# Altium PCB PCB1.PcbDoc (part 2 of 10)
Units mm, origin at the board's own origin, x right, y up, seen from the top; angles counter-clockwise.
Board outline 171.83 x 244.04 mm, 2 copper layers (Top Layer, Bottom Layer); 100 components, 186 nets, 878 pads, 221 vias.
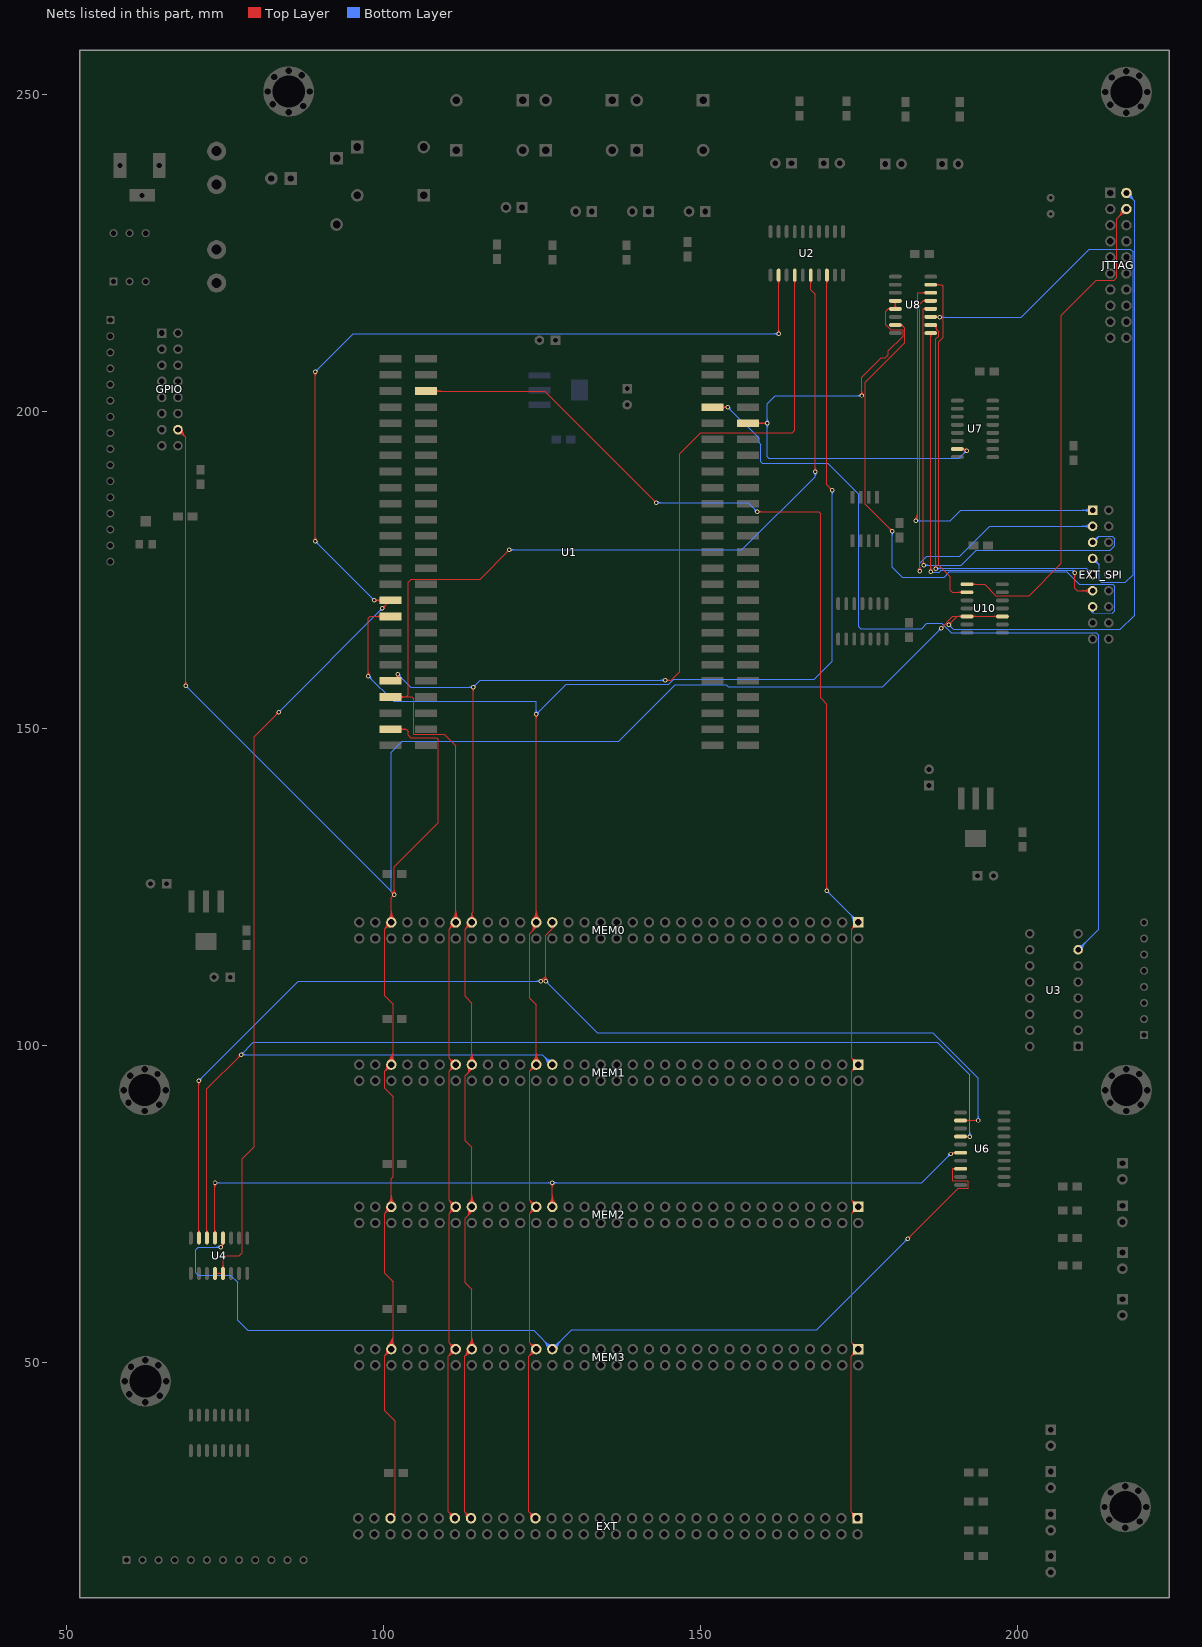
[diagram p2: the nets of this part, all layers, seen from the top]

## Via types
v1: diameter 0.7, hole 0.4, Top Layer to Bottom Layer, 221 vias

## Nets (pads, with @x,y where several pads share a name; then routed paths per layer and width w, separated by ;. In a path a pad name is that pad's centre, name@x,y a point inside that pad or via, vN(x,y) a via of type N, cw(c..) or ccw(c..) an arc to the next point about the centre after c; other vN are vias at no path point) (continued)
/32SEL: EXT.41 MEM0.41 MEM1.41 MEM2.41 MEM3.41 U1.83 U2.8 | length 344.2
  Top Layer w0.152: v1@97.419,158.436 ccw(c96.951,158.903) 97.612,158.903 ccw(c98.273,158.903) v1@97.806,158.436 ; v1(97.612,158.242) 97.612,167.322 97.93,167.64 U1.83@101.092,167.64 ; U1.83@99.572,167.27 ccw(c98.677,166.375) 98.677,167.64 ccw(c98.677,168.905) U1.83@99.572,168.01 ; U1.83@99.679,167.377 ccw(c99.045,166.743) 99.045,167.64 ccw(c99.045,168.537) U1.83@99.679,167.903 ; EXT.41@123.215,25.531 ccw(c122.226,25.706) 122.936,26.416 ; MEM3.41@123.333,52.008 cw(c121.967,51.896) 122.936,50.927 ; MEM3.41@123.339,52.186 ccw(c122.278,52.352) 123.038,53.111 ; MEM2.41@123.339,74.391 cw(c122.278,74.225) 123.038,73.465 ; MEM2.41@123.339,74.623 ccw(c122.278,74.789) 123.038,75.548 ; MEM1.41@123.339,96.827 cw(c122.278,96.661) 123.038,95.902 ; EXT.41@123.365,25.504 ccw(c122.577,25.644) 123.143,26.209 ccw(c123.708,26.775) EXT.41@123.848,25.987 ; 123.419,117.958 ccw(c122.897,118.479) MEM0.41@123.484,118.926 ; MEM3.41@123.485,52.021 cw(c122.397,51.931) 123.169,51.16 cw(c123.94,50.388) MEM3.41@124.03,51.476 ; MEM3.41@123.49,52.162 ccw(c122.645,52.295) 123.25,52.899 ccw(c123.854,53.504) MEM3.41@123.987,52.659 ; MEM2.41@123.49,74.414 cw(c122.645,74.282) 123.25,73.677 cw(c123.854,73.073) MEM2.41@123.987,73.917 ; MEM2.41@123.49,74.599 ccw(c122.645,74.731) 123.25,75.336 ccw(c123.854,75.941) MEM2.41@123.987,75.096 ; MEM1.41@123.49,96.851 cw(c122.645,96.719) 123.25,96.114 cw(c123.854,95.509) MEM1.41@123.987,96.354 ; EXT.41@123.515,25.478 ccw(c122.929,25.581) 123.35,26.002 ccw(c123.771,26.423) EXT.41@123.874,25.837 ; 123.542,118.081 ccw(c123.037,118.586) MEM0.41@123.605,119.018 ; MEM1.41@123.55,97.473 ccw(c122.271,98.751) 124.079,98.751 ccw(c125.887,98.751) MEM1.41@124.608,97.473 ; MEM0.41@123.55,119.909 ccw(c122.271,121.188) 124.079,121.188 ccw(c125.887,121.188) MEM0.41@124.608,119.909 ; MEM3.41@123.637,52.034 cw(c122.827,51.967) 123.401,51.392 cw(c123.976,50.818) MEM3.41@124.043,51.628 ; MEM3.41@123.64,52.139 ccw(c123.011,52.237) 123.462,52.687 ccw(c123.912,53.138) MEM3.41@124.01,52.509 ; MEM2.41@123.64,74.438 cw(c123.011,74.339) 123.462,73.889 cw(c123.912,73.439) MEM2.41@124.01,74.068 ; MEM2.41@123.64,74.575 ccw(c123.011,74.674) 123.462,75.124 ccw(c123.912,75.574) MEM2.41@124.01,74.945 ; MEM1.41@123.64,96.875 cw(c123.011,96.776) 123.462,96.326 cw(c123.912,95.876) MEM1.41@124.01,96.505 ; MEM1.41@123.657,97.365 ccw(c122.639,98.383) 124.079,98.383 ccw(c125.519,98.383) MEM1.41@124.501,97.365 ; MEM0.41@123.657,119.802 ccw(c122.639,120.82) 124.079,120.82 ccw(c125.519,120.82) MEM0.41@124.501,119.802 ; 123.665,118.204 ccw(c123.177,118.692) MEM0.41@123.726,119.111 ; MEM1.41@123.765,97.257 ccw(c123.007,98.015) 124.079,98.015 ccw(c125.151,98.015) MEM1.41@124.393,97.257 ; MEM0.41@123.765,119.694 ccw(c123.007,120.452) 124.079,120.452 ccw(c125.151,120.452) MEM0.41@124.393,119.694 ; 123.788,118.327 ccw(c123.317,118.799) MEM0.41@123.847,119.203 ; EXT.41@123.821,26.137 cw(c123.646,27.126) 122.936,26.416 ; v1@123.885,152.029 cw(c123.418,151.561) 124.079,151.561 cw(c124.74,151.561) v1@124.273,152.029 ; 123.912,118.451 ccw(c123.457,118.906) MEM0.41@123.968,119.296 ; EXT.41@123.952,25.4 122.936,26.416 ; MEM3.41@123.963,52.81 cw(c123.797,53.871) 123.038,53.111 ; MEM2.41@123.963,73.767 ccw(c123.797,72.706) 123.038,73.465 ; MEM2.41@123.963,75.246 cw(c123.797,76.307) 123.038,75.548 ; MEM1.41@123.963,96.204 ccw(c123.797,95.143) 123.038,95.902 ; MEM3.41@124.017,51.324 ccw(c123.905,49.958) 122.936,50.927 ; v1(124.079,152.222) MEM0.41@124.079,119.38 124.079,118.618 123.038,117.577 123.038,107.417 124.079,106.375 MEM1.41@124.079,96.943 123.038,95.902 ; U2.8@169.764,220.615 cw(c169.374,220.225) 169.926,220.225 cw(c170.478,220.225) U2.8@170.088,220.615 ; U2.8@169.926,221.488 169.926,188.443 v1(170.79,187.579) ; v1@170.516,187.579 ccw(c169.855,187.579) 170.322,188.046 ccw(c170.79,188.514) v1@170.79,187.853 ; 122.936,26.416 122.936,50.927 ; 122.936,50.927 MEM3.41@124.079,52.07 123.038,53.111 ; 123.038,53.111 123.038,73.465 ; 123.038,73.465 MEM2.41@124.079,74.507 123.038,75.548 ; 123.038,75.548 123.038,95.902
  Bottom Layer w0.152: v1@97.612,157.968 cw(c97.612,157.307) 98.08,157.775 cw(c98.547,158.242) v1@97.886,158.242 ; v1(97.612,158.242) 101.625,154.229 124.079,154.229 v1(124.079,152.222) 128.796,156.939 144.952,156.939 145.743,157.73 167.966,157.73 170.79,160.553 v1(170.79,187.579) ; v1@123.885,152.416 ccw(c123.418,152.883) 124.079,152.883 ccw(c124.74,152.883) v1@124.273,152.416 ; v1@124.079,152.496 ccw(c124.079,153.157) 124.546,152.69 ccw(c125.014,152.222) v1@124.353,152.222 ; v1@170.596,187.385 cw(c170.129,186.918) 170.79,186.918 cw(c171.451,186.918) v1@170.983,187.385
/CS: U1.81 U2.2 U4.4 U4.5 | length 266.2
  Top Layer w0.152: U4.4@73.406,64.008 U4.5@74.676,64.008 74.676,66.358 75.12,66.802 77.216,66.802 77.724,67.31 77.724,82.093 79.604,83.972 79.604,148.692 v1(83.439,152.527) ; U4.4@73.568,63.846 cw(c73.958,63.456) 73.958,64.008 cw(c73.958,64.56) U4.4@73.568,64.17 ; U4.5@74.514,63.846 ccw(c74.124,63.456) 74.124,64.008 ccw(c74.124,64.56) U4.5@74.514,64.17 ; U4.5@74.514,64.881 ccw(c74.124,65.271) 74.676,65.271 ccw(c75.228,65.271) U4.5@74.838,64.881 ; v1@83.165,152.527 cw(c82.504,152.527) 82.972,152.06 cw(c83.439,151.592) v1@83.439,152.253 ; v1@89.037,179.695 ccw(c88.569,180.163) 89.23,180.163 ccw(c89.891,180.163) v1@89.424,179.695 ; v1@89.037,206.042 cw(c88.569,205.574) 89.23,205.574 cw(c89.891,205.574) v1@89.424,206.042 ; v1(89.23,179.502) v1(89.23,206.235) ; v1(98.552,170.18) U1.81@101.092,170.18 v1(99.822,168.91) ; v1@98.746,169.986 cw(c99.213,169.519) 99.213,170.18 cw(c99.213,170.841) v1@98.746,170.374 ; U1.81@99.572,169.81 ccw(c98.677,168.915) 98.677,170.18 ccw(c98.677,171.445) U1.81@99.572,170.55 ; U1.81@99.679,169.917 ccw(c99.045,169.283) 99.045,170.18 ccw(c99.045,171.077) U1.81@99.679,170.443 ; v1@99.822,169.184 ccw(c99.822,169.845) 100.289,169.377 ccw(c100.757,168.91) v1@100.096,168.91 ; v1@162.112,212.411 ccw(c161.645,212.878) 162.306,212.878 ccw(c162.967,212.878) v1@162.5,212.411 ; U2.2@162.144,220.615 cw(c161.754,220.225) 162.306,220.225 cw(c162.858,220.225) U2.2@162.468,220.615 ; v1(162.306,212.217) U2.2@162.306,221.488
  Bottom Layer w0.152: v1(83.439,152.527) v1(99.822,168.91) ; v1@83.439,152.801 ccw(c83.439,153.462) 83.906,152.994 ccw(c84.374,152.527) v1@83.713,152.527 ; v1@89.23,179.228 cw(c89.23,178.567) 89.698,179.034 cw(c90.165,179.502) v1@89.504,179.502 ; v1(89.23,179.502) v1(98.552,170.18) ; v1(89.23,206.235) 95.212,212.217 v1(162.306,212.217) ; v1@89.23,206.509 ccw(c89.23,207.17) 89.698,206.703 ccw(c90.165,206.235) v1@89.504,206.235 ; v1@98.278,170.18 ccw(c97.617,170.18) 98.085,170.647 ccw(c98.552,171.115) v1@98.552,170.454 ; v1@99.548,168.91 cw(c98.887,168.91) 99.355,168.443 cw(c99.822,167.975) v1@99.822,168.636 ; v1@162.112,212.023 ccw(c161.645,211.556) 161.645,212.217 ccw(c161.645,212.878) v1@162.112,212.411
/CS0: MEM0.39 U4.15 U6.2 | length 190.8
  Top Layer w0.152: v1@70.672,94.244 cw(c70.205,93.776) 70.866,93.776 cw(c71.527,93.776) v1@71.06,94.244 ; U4.15@70.704,70.469 ccw(c70.314,70.859) 70.866,70.859 ccw(c71.418,70.859) U4.15@71.028,70.469 ; U4.15@70.866,69.596 v1(70.866,94.437) ; v1(124.79,110.109) 125.578,110.896 ; v1@124.79,110.383 ccw(c124.79,111.044) 125.258,110.576 ccw(c125.725,110.109) v1@125.064,110.109 ; v1@125.384,110.303 ccw(c124.917,110.77) 125.578,110.77 ccw(c126.239,110.77) v1@125.771,110.303 ; v1(125.578,110.109) 125.578,110.896 ; MEM0.39@126.415,118.66 cw(c126.338,118.389) 126.619,118.389 ; MEM0.39@126.619,119.38 126.619,118.389 ; MEM0.39@126.823,118.66 ccw(c126.9,118.389) 126.619,118.389 ; U6.2@191.008,88.138 v1(193.802,88.138) ; U6.2@191.881,87.976 cw(c192.271,87.586) 192.271,88.138 cw(c192.271,88.69) U6.2@191.881,88.3 ; v1@193.608,87.944 ccw(c193.141,87.477) 193.141,88.138 ccw(c193.141,88.799) v1@193.608,88.332 ; 125.578,110.896 125.578,117.348 126.619,118.389
  Bottom Layer w0.152: v1(70.866,94.437) 86.538,110.109 v1(124.79,110.109) ; v1@70.866,94.711 ccw(c70.866,95.372) 71.333,94.905 ccw(c71.801,94.437) v1@71.14,94.437 ; v1@124.597,109.915 ccw(c124.129,109.448) 124.129,110.109 ccw(c124.129,110.77) v1@124.597,110.303 ; v1@125.578,109.835 cw(c125.578,109.174) 126.045,109.642 cw(c126.512,110.109) v1@125.851,110.109 ; v1(125.578,110.109) 133.731,101.956 186.614,101.956 193.802,94.767 v1(193.802,88.138) ; v1@193.608,88.332 ccw(c193.141,88.799) 193.802,88.799 ccw(c194.463,88.799) v1@193.996,88.332
/CS1: MEM1.39 U4.14 U6.4 | length 223.7
  Top Layer w0.152: U4.14@71.974,70.469 ccw(c71.584,70.859) 72.136,70.859 ccw(c72.688,70.859) U4.14@72.298,70.469 ; U4.14@72.136,69.596 72.136,93.142 v1(77.521,98.527) ; v1@77.247,98.527 cw(c76.586,98.527) 77.053,98.059 cw(c77.521,97.592) v1@77.521,98.253 ; U6.4@191.008,85.598 v1(192.456,85.598) ; U6.4@191.881,85.436 cw(c192.271,85.046) 192.271,85.598 cw(c192.271,86.15) U6.4@191.881,85.76 ; v1@192.262,85.404 ccw(c191.795,84.937) 191.795,85.598 ccw(c191.795,86.259) v1@192.262,85.792
  Bottom Layer w0.152: v1@77.521,98.8 ccw(c77.521,99.461) 77.988,98.994 ccw(c78.456,98.527) v1@77.795,98.527 ; v1@77.714,98.333 cw(c78.182,97.866) 78.182,98.527 cw(c78.182,99.188) v1@77.714,98.72 ; MEM1.39@125.87,96.943 ccw(c124.062,96.943) 125.341,98.222 ccw(c126.619,99.5) MEM1.39@126.619,97.692 ; MEM1.39@126.023,96.943 ccw(c124.583,96.943) 125.601,97.961 ccw(c126.619,98.98) MEM1.39@126.619,97.54 ; MEM1.39@126.175,96.943 ccw(c125.103,96.943) 125.861,97.701 ccw(c126.619,98.459) MEM1.39@126.619,97.387 ; MEM1.39@126.619,96.943 125.036,98.527 v1(77.521,98.527) 79.451,100.457 187.325,100.457 192.456,95.326 v1(192.456,85.598) ; v1@192.262,85.792 ccw(c191.795,86.259) 192.456,86.259 ccw(c193.117,86.259) v1@192.649,85.792
/CS2: MEM2.39 U4.13 U6.6 | length 149.2
  Top Layer w0.152: v1@73.212,78.115 cw(c72.745,77.647) 73.406,77.647 cw(c74.067,77.647) v1@73.6,78.115 ; U4.13@73.244,70.469 ccw(c72.854,70.859) 73.406,70.859 ccw(c73.958,70.859) U4.13@73.568,70.469 ; U4.13@73.406,69.596 v1(73.406,78.308) ; MEM2.39@126.09,75.036 ccw(c124.811,76.314) 126.619,76.314 ccw(c128.427,76.314) MEM2.39@127.148,75.036 ; MEM2.39@126.197,74.928 ccw(c125.179,75.947) 126.619,75.947 ccw(c128.059,75.947) MEM2.39@127.041,74.928 ; MEM2.39@126.305,74.821 ccw(c125.547,75.579) 126.619,75.579 ccw(c127.691,75.579) MEM2.39@126.933,74.821 ; v1@126.425,78.115 cw(c125.958,77.647) 126.619,77.647 cw(c127.28,77.647) v1@126.813,78.115 ; MEM2.39@126.619,74.507 v1(126.619,78.308) ; v1@189.411,82.877 cw(c189.849,82.439) 189.849,83.058 ; v1(189.433,82.855) 189.636,83.058 U6.6@191.008,83.058 ; v1@189.519,82.769 cw(c190.217,82.071) U6.6@190.217,83.058 ; v1@189.627,82.661 cw(c190.585,81.703) U6.6@190.585,83.058 ; U6.6@190.135,82.896 ccw(c189.745,82.506) 189.745,83.058 ccw(c189.745,83.61) U6.6@190.135,83.22
  Bottom Layer w0.152: v1(73.406,78.308) v1(126.619,78.308) 184.887,78.308 v1(189.433,82.855) ; v1@73.6,78.115 cw(c74.067,77.647) 74.067,78.308 cw(c74.067,78.969) v1@73.6,78.502 ; v1@126.425,78.115 ccw(c125.958,77.647) 125.958,78.308 ccw(c125.958,78.969) v1@126.425,78.502 ; v1@126.813,78.115 cw(c127.28,77.647) 127.28,78.308 cw(c127.28,78.969) v1@126.813,78.502 ; v1@189.159,82.855 cw(c188.498,82.855) 188.966,82.387 cw(c189.433,81.92) v1@189.433,82.581
/CS3: MEM3.39 U4.12 U6.8 | length 176
  Top Layer w0.152: v1(74.295,68.174) 74.676,68.555 ; v1@74.337,68.444 ccw(c74.398,68.833) 74.676,68.555 ; v1@74.46,68.339 ccw(c74.236,68.563) U4.12@74.492,68.75 ; v1@74.566,68.216 cw(c74.954,68.277) 74.676,68.555 ; 74.586,68.464 ccw(c74.381,68.669) U4.12@74.615,68.84 ; U4.12@74.596,68.671 cw(c74.552,68.555) 74.676,68.555 ; U4.12@74.676,69.596 74.676,68.555 ; U4.12@74.756,68.671 ccw(c74.8,68.555) 74.676,68.555 ; v1(182.651,69.469) 190.652,77.47 192.202,77.47 192.227,77.495 192.227,78.461 192.075,78.613 189.84,78.613 189.789,78.664 189.789,80.493 189.814,80.518 ; v1@182.651,69.743 ccw(c182.651,70.404) 183.119,69.936 ccw(c183.586,69.469) v1@182.925,69.469 ; U6.8@190.12,80.373 ccw(c189.814,80.123) 189.814,80.518 ; U6.8@190.12,80.663 cw(c189.814,80.913) 189.814,80.518 ; U6.8@191.008,80.518 189.814,80.518
  Bottom Layer w0.152: v1@74.101,67.98 ccw(c73.634,67.513) 73.634,68.174 ccw(c73.634,68.835) v1@74.101,68.367 ; v1(74.295,68.174) 70.802,68.174 70.358,67.729 70.358,64.135 70.739,63.754 75.794,63.754 76.962,62.586 76.962,56.642 78.562,55.042 123.647,55.042 MEM3.39@126.619,52.07 129.692,55.143 168.326,55.143 v1(182.651,69.469) ; MEM3.39@125.87,52.07 ccw(c124.062,52.07) 125.341,53.348 ccw(c126.619,54.627) 126.619,52.819 ccw(c126.619,54.627) 127.897,53.348 ccw(c129.176,52.07) MEM3.39@127.368,52.07 ; MEM3.39@126.023,52.07 ccw(c124.583,52.07) 125.601,53.088 ccw(c126.619,54.106) 126.619,52.666 ccw(c126.619,54.106) 127.637,53.088 ccw(c128.655,52.07) MEM3.39@127.215,52.07 ; MEM3.39@126.175,52.07 ccw(c125.103,52.07) 125.861,52.828 ccw(c126.619,53.586) 126.619,52.514 ccw(c126.619,53.586) 127.377,52.828 ccw(c128.135,52.07) MEM3.39@127.063,52.07 ; v1@182.378,69.469 cw(c181.717,69.469) 182.184,69.002 cw(c182.651,68.534) v1@182.651,69.195
/CS_JTTAG: JTTAG.4 U10.1 | length 87.2
  Top Layer w0.152: U10.1@192.024,172.72 194.818,172.72 196.596,170.942 201.803,170.942 206.858,175.997 206.858,215.138 212.42,220.701 215.265,220.701 215.671,221.107 215.671,230.403 JTTAG.4@217.17,231.902 ; U10.1@192.897,172.558 cw(c193.287,172.168) 193.287,172.72 cw(c193.287,173.272) U10.1@192.897,172.882 ; JTTAG.4@216.421,231.902 cw(c214.613,231.902) 215.892,230.624 cw(c217.17,229.345) JTTAG.4@217.17,231.153 ; JTTAG.4@216.574,231.902 cw(c215.134,231.902) 216.152,230.884 cw(c217.17,229.866) JTTAG.4@217.17,231.306 ; JTTAG.4@216.726,231.902 cw(c215.654,231.902) 216.412,231.144 cw(c217.17,230.386) JTTAG.4@217.17,231.458
/CS_SPI: U1.10 U7.7 U8.4 U8.5 | length 97.4
  Top Layer w0.152: U1.10@157.48,198.12 v1(160.528,198.12) ; U1.10@158.893,197.857 cw(c159.527,197.223) 159.527,198.12 cw(c159.527,199.017) U1.10@158.893,198.383 ; U1.10@159,197.75 cw(c159.895,196.855) 159.895,198.12 cw(c159.895,199.385) U1.10@159,198.49 ; v1@160.334,197.926 ccw(c159.867,197.459) 159.867,198.12 ccw(c159.867,198.781) v1@160.334,198.314 ; v1@175.244,202.682 ccw(c174.777,203.15) 175.438,203.15 ccw(c176.099,203.15) v1@175.631,202.682 ; v1(175.438,202.489) 175.438,205.359 178.505,208.426 179.113,208.426 179.602,208.915 179.602,209.523 181.94,211.861 181.94,212.827 181.915,212.852 180.01,212.852 179.222,213.639 179.222,215.773 179.603,216.154 ; U8.5@179.814,216.035 ccw(c179.603,215.907) 179.603,216.154 ; U8.5@179.814,216.273 cw(c179.603,216.401) 179.603,216.154 ; U8.5@180.559,216.316 ccw(c180.169,216.706) 180.721,216.706 ccw(c181.273,216.706) U8.5@180.883,216.316 ; U8.4@180.559,217.262 cw(c180.169,216.872) 180.721,216.872 cw(c181.273,216.872) U8.4@180.883,217.262 ; U8.4@180.721,217.424 U8.5@180.721,216.154 179.603,216.154 ; U7.7@190.5,194.056 191.719,194.056 ; U7.7@190.699,194.056 cw(c190.699,192.528) v1@191.78,193.608 ; U7.7@191.067,194.056 cw(c191.067,192.896) v1@191.887,193.716 ; U7.7@191.382,193.904 cw(c191.719,193.606) 191.719,194.056 ; U7.7@191.382,194.208 ccw(c191.719,194.506) 191.719,194.056 ; U7.7@191.435,194.056 cw(c191.435,193.264) v1@191.995,193.824 ; v1(191.973,193.802) 191.719,194.056
  Bottom Layer w0.152: v1@160.334,197.926 cw(c159.867,197.459) 160.528,197.459 cw(c161.189,197.459) v1@160.722,197.926 ; v1@160.334,198.314 ccw(c159.867,198.781) 160.528,198.781 ccw(c161.189,198.781) v1@160.722,198.314 ; v1@175.244,202.295 ccw(c174.777,201.828) 174.777,202.489 ccw(c174.777,203.15) v1@175.244,202.682 ; v1(175.438,202.489) 161.798,202.489 160.528,201.219 v1(160.528,198.12) 160.528,192.837 160.782,192.583 190.754,192.583 v1(191.973,193.802) ; v1@191.699,193.802 cw(c191.038,193.802) 191.506,193.335 cw(c191.973,192.867) v1@191.973,193.528
/OE: EXT.51 MEM0.51 MEM1.51 MEM2.51 MEM3.51 U1.93 U2.6 | length 317.9
  Top Layer w0.152: U1.93@101.092,154.94 103.569,154.94 ; U1.93@102.505,154.677 cw(c103.139,154.043) 103.139,154.94 cw(c103.139,155.837) U1.93@102.505,155.203 ; U1.93@102.612,154.57 cw(c103.507,153.675) 103.507,154.94 cw(c103.507,156.205) U1.93@102.612,155.31 ; EXT.51@110.515,25.531 ccw(c109.526,25.706) 110.236,26.416 ; MEM3.51@110.633,52.008 cw(c109.267,51.896) 110.236,50.927 ; MEM3.51@110.639,52.186 ccw(c109.578,52.352) 110.338,53.111 ; MEM2.51@110.639,74.391 cw(c109.578,74.225) 110.338,73.465 ; MEM2.51@110.639,74.623 ccw(c109.578,74.789) 110.338,75.548 ; MEM1.51@110.639,96.827 cw(c109.578,96.661) 110.338,95.902 ; MEM1.51@110.639,97.059 ccw(c109.578,97.225) 110.338,97.985 ; MEM0.51@110.639,119.264 cw(c109.578,119.098) 110.338,118.339 ; EXT.51@110.665,25.504 ccw(c109.877,25.644) 110.443,26.209 ccw(c111.008,26.775) EXT.51@111.148,25.987 ; MEM3.51@110.785,52.021 cw(c109.697,51.931) 110.469,51.16 cw(c111.24,50.388) MEM3.51@111.33,51.476 ; MEM3.51@110.79,52.162 ccw(c109.945,52.295) 110.55,52.899 ccw(c111.154,53.504) MEM3.51@111.287,52.659 ; MEM2.51@110.79,74.414 cw(c109.945,74.282) 110.55,73.677 cw(c111.154,73.073) MEM2.51@111.287,73.917 ; MEM2.51@110.79,74.599 ccw(c109.945,74.731) 110.55,75.336 ccw(c111.154,75.941) MEM2.51@111.287,75.096 ; MEM1.51@110.79,96.851 cw(c109.945,96.719) 110.55,96.114 cw(c111.154,95.509) MEM1.51@111.287,96.354 ; MEM1.51@110.79,97.036 ccw(c109.945,97.168) 110.55,97.773 ccw(c111.154,98.377) MEM1.51@111.287,97.533 ; MEM0.51@110.79,119.288 cw(c109.945,119.155) 110.55,118.551 cw(c111.154,117.946) MEM0.51@111.287,118.791 ; EXT.51@110.815,25.478 ccw(c110.229,25.581) 110.65,26.002 ccw(c111.071,26.423) EXT.51@111.174,25.837 ; MEM0.51@110.85,119.909 ccw(c109.571,121.188) 111.379,121.188 ccw(c113.187,121.188) MEM0.51@111.908,119.909 ; MEM3.51@110.937,52.034 cw(c110.127,51.967) 110.701,51.392 cw(c111.276,50.818) MEM3.51@111.343,51.628 ; MEM3.51@110.94,52.139 ccw(c110.311,52.237) 110.762,52.687 ccw(c111.212,53.138) MEM3.51@111.31,52.509 ; MEM2.51@110.94,74.438 cw(c110.311,74.339) 110.762,73.889 cw(c111.212,73.439) MEM2.51@111.31,74.068 ; MEM2.51@110.94,74.575 ccw(c110.311,74.674) 110.762,75.124 ccw(c111.212,75.574) MEM2.51@111.31,74.945 ; MEM1.51@110.94,96.875 cw(c110.311,96.776) 110.762,96.326 cw(c111.212,95.876) MEM1.51@111.31,96.505 ; MEM1.51@110.94,97.012 ccw(c110.311,97.111) 110.762,97.561 ccw(c111.212,98.011) MEM1.51@111.31,97.382 ; MEM0.51@110.94,119.311 cw(c110.311,119.213) 110.762,118.763 cw(c111.212,118.312) MEM0.51@111.31,118.941 ; MEM0.51@110.957,119.802 ccw(c109.939,120.82) 111.379,120.82 ccw(c112.819,120.82) MEM0.51@111.801,119.802 ; MEM0.51@111.065,119.694 ccw(c110.307,120.452) 111.379,120.452 ccw(c112.451,120.452) MEM0.51@111.693,119.694 ; EXT.51@111.121,26.137 cw(c110.946,27.126) 110.236,26.416 ; EXT.51@111.252,25.4 110.236,26.416 ; MEM3.51@111.263,52.81 cw(c111.097,53.871) 110.338,53.111 ; MEM2.51@111.263,73.767 ccw(c111.097,72.706) 110.338,73.465 ; MEM2.51@111.263,75.246 cw(c111.097,76.307) 110.338,75.548 ; MEM1.51@111.263,96.204 ccw(c111.097,95.143) 110.338,95.902 ; MEM1.51@111.263,97.683 cw(c111.097,98.744) 110.338,97.985 ; MEM0.51@111.263,118.64 ccw(c111.097,117.579) 110.338,118.339 ; MEM3.51@111.317,51.324 ccw(c111.205,49.958) 110.236,50.927 ; v1@119.563,178.13 cw(c118.902,178.13) 119.37,177.663 cw(c119.837,177.195) v1@119.837,177.856 ; v1(119.837,178.13) 115.24,173.533 104.381,173.533 103.886,173.037 103.886,155.257 103.569,154.94 ; U2.6@167.224,220.615 cw(c166.834,220.225) 167.386,220.225 cw(c167.938,220.225) U2.6@167.548,220.615 ; U2.6@167.386,221.488 167.386,219.177 168.097,218.465 v1(168.097,190.462) ; v1@167.904,190.656 ccw(c167.436,191.123) 168.097,191.123 ccw(c168.758,191.123) v1@168.291,190.656 ; 103.569,154.94 104.409,154.94 104.727,154.623 104.727,149.098 104.768,149.057 109.591,149.057 111.379,147.269 MEM0.51@111.379,119.38 110.338,118.339 ; 110.236,26.416 110.236,50.927 ; 110.236,50.927 MEM3.51@111.379,52.07 110.338,53.111 ; 110.338,53.111 110.338,73.465 ; 110.338,73.465 MEM2.51@111.379,74.507 110.338,75.548 ; 110.338,75.548 110.338,95.902 ; 110.338,95.902 MEM1.51@111.379,96.943 110.338,97.985 ; 110.338,97.985 110.338,118.339
  Bottom Layer w0.152: v1(119.837,178.13) 156.521,178.13 168.097,189.706 v1(168.097,190.462) ; v1@120.031,177.937 cw(c120.498,177.469) 120.498,178.13 cw(c120.498,178.791) v1@120.031,178.324 ; v1@167.904,190.268 cw(c167.436,189.801) 168.097,189.801 cw(c168.758,189.801) v1@168.291,190.268
/RESET: EXT.59 GPIO.14 JTTAG.2 MEM0.59 MEM1.59 MEM2.59 MEM3.59 U1.97 U10.5 U10.10 | length 536.9
  Top Layer w0.152: GPIO.14@67.564,196.43 cw(c67.564,194.804) 68.714,195.954 cw(c69.864,197.104) GPIO.14@68.238,197.104 ; GPIO.14@67.564,196.583 cw(c67.564,195.324) 68.454,196.214 cw(c69.344,197.104) GPIO.14@68.085,197.104 ; GPIO.14@67.564,196.735 cw(c67.564,195.844) 68.194,196.474 cw(c68.824,197.104) GPIO.14@67.933,197.104 ; GPIO.14@67.564,197.104 68.783,195.885 v1(68.783,156.693) ; v1@68.59,156.886 ccw(c68.122,157.354) 68.783,157.354 ccw(c69.444,157.354) v1@68.977,156.886 ; MEM3.59@100.479,51.954 cw(c99.418,51.788) 100.178,51.029 ; MEM2.59@100.479,74.391 cw(c99.418,74.225) 100.178,73.465 ; MEM1.59@100.479,96.827 cw(c99.418,96.661) 100.178,95.902 ; MEM0.59@100.479,119.264 cw(c99.418,119.098) 100.178,118.339 ; MEM3.59@100.63,51.978 cw(c99.785,51.845) 100.39,51.241 cw(c100.994,50.636) MEM3.59@101.127,51.481 ; MEM2.59@100.63,74.414 cw(c99.785,74.282) 100.39,73.677 cw(c100.994,73.073) MEM2.59@101.127,73.917 ; MEM1.59@100.63,96.851 cw(c99.785,96.719) 100.39,96.114 cw(c100.994,95.509) MEM1.59@101.127,96.354 ; MEM0.59@100.63,119.288 cw(c99.785,119.155) 100.39,118.551 cw(c100.994,117.946) MEM0.59@101.127,118.791 ; MEM3.59@100.69,52.599 ccw(c98.614,54.675) 101.549,54.675 ; MEM2.59@100.69,75.036 ccw(c99.411,76.314) 101.219,76.314 ccw(c103.027,76.314) MEM2.59@101.748,75.036 ; MEM1.59@100.69,97.473 ccw(c98.614,99.548) 101.549,99.548 ; MEM0.59@100.69,119.909 ccw(c99.411,121.188) 101.219,121.188 ccw(c103.027,121.188) MEM0.59@101.748,119.909 ; MEM3.59@100.78,52.001 cw(c100.151,51.903) 100.602,51.453 cw(c101.052,51.002) MEM3.59@101.15,51.631 ; MEM2.59@100.78,74.438 cw(c100.151,74.339) 100.602,73.889 cw(c101.052,73.439) MEM2.59@101.15,74.068 ; MEM1.59@100.78,96.875 cw(c100.151,96.776) 100.602,96.326 cw(c101.052,95.876) MEM1.59@101.15,96.505 ; MEM0.59@100.78,119.311 cw(c100.151,119.213) 100.602,118.763 cw(c101.052,118.312) MEM0.59@101.15,118.941 ; MEM3.59@100.797,52.492 ccw(c98.982,54.307) 101.549,54.307 ; MEM2.59@100.797,74.928 ccw(c99.779,75.947) 101.219,75.947 ccw(c102.659,75.947) MEM2.59@101.641,74.928 ; MEM1.59@100.797,97.365 ccw(c98.982,99.18) 101.549,99.18 ; MEM0.59@100.797,119.802 ccw(c99.779,120.82) 101.219,120.82 ccw(c102.659,120.82) MEM0.59@101.641,119.802 ; MEM3.59@100.905,52.384 ccw(c99.35,53.939) 101.549,53.939 ; MEM2.59@100.905,74.821 ccw(c100.147,75.579) 101.219,75.579 ccw(c102.291,75.579) MEM2.59@101.533,74.821 ; MEM1.59@100.905,97.257 ccw(c99.35,98.812) 101.549,98.812 ; MEM0.59@100.905,119.694 ccw(c100.147,120.452) 101.219,120.452 ccw(c102.291,120.452) MEM0.59@101.533,119.694 ; MEM3.59@101.013,52.276 ccw(c99.718,53.571) 101.549,53.571 ; MEM1.59@101.013,97.15 ccw(c99.718,98.444) 101.549,98.444 ; EXT.59@101.092,25.4 101.803,26.111 101.803,40.712 100.178,42.338 100.178,51.029 ; U1.97@101.092,149.86 103.569,149.86 103.886,149.542 103.886,148.907 104.296,148.498 108.41,148.498 108.636,148.273 108.636,135.128 101.702,128.194 v1(101.702,123.774) ; MEM3.59@101.103,51.33 ccw(c100.937,50.269) 100.178,51.029 ; MEM2.59@101.103,73.767 ccw(c100.937,72.706) 100.178,73.465 ; MEM1.59@101.103,96.204 ccw(c100.937,95.143) 100.178,95.902 ; MEM0.59@101.103,118.64 ccw(c100.937,117.579) 100.178,118.339 ; MEM3.59@101.121,52.168 ccw(c100.086,53.203) 101.549,53.203 ; MEM1.59@101.121,97.042 ccw(c100.086,98.077) 101.549,98.077 ; 101.219,124.257 v1(101.702,123.774) ; MEM3.59@101.228,52.061 ccw(c100.454,52.835) 101.549,52.835 ; MEM1.59@101.228,96.934 ccw(c100.454,97.709) 101.549,97.709 ; v1@101.508,123.968 ccw(c101.041,124.435) 101.702,124.435 ccw(c102.363,124.435) v1@101.895,123.968 ; 101.549,53.081 ccw(c102.23,53.081) MEM3.59@101.748,52.599 ; 101.549,97.954 ccw(c102.23,97.954) MEM1.59@101.748,97.473 ; v1@101.702,123.5 ccw(c101.702,122.839) 101.234,123.307 ccw(c100.767,123.774) 101.428,123.774 ccw(c100.767,123.774) 101.234,124.242 ccw(c101.702,124.709) v1@101.702,124.048 ; U1.97@102.505,149.597 cw(c103.139,148.963) 103.139,149.86 cw(c103.139,150.757) U1.97@102.505,150.123 ; U1.97@102.612,149.49 cw(c103.507,148.595) 103.507,149.86 cw(c103.507,151.125) U1.97@102.612,150.23 ; v1(187.973,165.798) 189.814,167.64 190.449,167.64 ; v1@187.973,166.072 ccw(c187.973,166.733) 188.44,166.266 ccw(c188.908,165.798) v1@188.246,165.798 ; v1(189.141,166.332) 190.449,167.64 ; v1@189.141,166.606 ccw(c189.141,167.267) 189.609,166.799 ccw(c190.076,166.332) v1@189.415,166.332 ; U10.5@191.151,167.478 ccw(c190.761,167.088) 190.761,167.64 ccw(c190.761,168.192) U10.5@191.151,167.802 ; U10.5@192.897,167.478 cw(c193.287,167.088) 193.287,167.64 cw(c193.287,168.192) U10.5@192.897,167.802 ; U10.10@196.739,167.478 ccw(c196.349,167.088) 196.349,167.64 ccw(c196.349,168.192) U10.10@196.739,167.802 ; U10.10@197.612,167.64 U10.5@192.024,167.64 190.449,167.64 ; 100.178,51.029 MEM3.59@101.219,52.07 101.549,52.07 101.549,62.687 100.178,64.059 100.178,73.465 ; 100.178,73.465 MEM2.59@101.219,74.507 101.219,78.918 101.549,79.248 101.549,91.846 100.178,93.218 100.178,95.902 ; 100.178,95.902 MEM1.59@101.219,96.943 101.549,96.943 101.549,106.477 100.178,107.848 100.178,118.339 ; 100.178,118.339 MEM0.59@101.219,119.38 101.219,123.292 v1(101.702,123.774)
  Bottom Layer w0.152: v1@68.783,156.419 cw(c68.783,155.758) 69.251,156.225 cw(c69.718,156.693) v1@69.057,156.693 ; v1(68.783,156.693) 101.219,124.257 ; v1@101.428,123.774 ccw(c100.767,123.774) 101.234,124.242 ccw(c101.702,124.709) v1@101.702,124.048 ; v1(101.702,123.774) 101.219,124.257 ; v1@187.699,165.798 cw(c187.038,165.798) 187.505,165.331 cw(c187.973,164.864) v1@187.973,165.525 ; v1(187.973,165.798) 178.765,156.591 154.356,156.591 154.082,156.865 145.995,156.865 137.085,147.955 102.972,147.955 101.219,146.202 101.219,124.257 ; v1@189.141,166.058 cw(c189.141,165.397) 189.609,165.864 cw(c190.076,166.332) v1@189.415,166.332 ; v1(189.141,166.332) 189.89,165.583 216.23,165.583 218.491,167.843 218.491,233.121 JTTAG.2@217.17,234.442 ; JTTAG.2@217.17,233.693 cw(c217.17,231.885) 218.448,233.164 cw(c219.727,234.442) JTTAG.2@217.919,234.442 ; JTTAG.2@217.17,233.846 cw(c217.17,232.406) 218.188,233.424 cw(c219.206,234.442) JTTAG.2@217.766,234.442 ; JTTAG.2@217.17,233.998 cw(c217.17,232.926) 217.928,233.684 cw(c218.686,234.442) JTTAG.2@217.614,234.442
/SPICS0: U8.15 U10.2 | length 55.7
  Top Layer w0.152: U8.15@186.309,219.964 188.062,219.964 188.31,219.716 188.31,211.716 187.528,210.934 187.528,175.707 189.344,173.891 189.344,171.767 189.662,171.45 U10.2@192.024,171.45 ; U8.15@187.182,219.802 cw(c187.572,219.412) 187.572,219.964 cw(c187.572,220.516) U8.15@187.182,220.126 ; U10.2@191.151,171.288 ccw(c190.761,170.898) 190.761,171.45 ccw(c190.761,172.002) U10.2@191.151,171.612
/SPICS1: EXT_SPI.1 U8.14 | length 77.8
  Top Layer w0.152: v1@183.779,182.947 ccw(c182.637,184.089) 184.252,184.089 ; v1@183.886,182.839 ccw(c183.005,183.721) 184.252,183.721 ; v1(183.972,182.753) 184.252,183.032 184.252,218.669 184.277,218.694 U8.14@186.309,218.694 ; v1@183.994,182.731 ccw(c183.373,183.353) 184.252,183.353 ; v1@184.102,182.623 ccw(c183.74,182.985) 184.252,182.985 ; U8.14@185.436,218.532 ccw(c185.046,218.142) 185.046,218.694 ccw(c185.046,219.246) U8.14@185.436,218.856
  Bottom Layer w0.152: v1(183.972,182.753) 189.382,182.753 191.033,184.404 EXT_SPI.1@211.836,184.404 ; v1@184.166,182.559 cw(c184.633,182.092) 184.633,182.753 cw(c184.633,183.414) v1@184.166,182.947 ; EXT_SPI.1@211.36,183.928 ccw(c210.209,182.777) 210.209,184.404 ccw(c210.209,186.031) EXT_SPI.1@211.36,184.88 ; EXT_SPI.1@211.467,184.035 ccw(c210.577,183.145) 210.577,184.404 ccw(c210.577,185.663) EXT_SPI.1@211.467,184.773 ; EXT_SPI.1@211.575,184.143 ccw(c210.945,183.513) 210.945,184.404 ccw(c210.945,185.295) EXT_SPI.1@211.575,184.665
/SPICS2: EXT_SPI.3 U8.13 | length 83.8
  Top Layer w0.152: v1@184.35,174.971 ccw(c183.883,175.438) 184.544,175.438 ccw(c185.205,175.438) v1@184.737,174.971 ; v1(184.544,174.777) 184.544,216.865 185.102,217.424 ; U8.13@185.424,217.276 ccw(c185.103,217.002) 185.103,217.424 ; U8.13@185.424,217.572 cw(c185.103,217.846) 185.103,217.424 ; U8.13@186.309,217.424 185.102,217.424
  Bottom Layer w0.152: v1@184.35,174.971 ccw(c183.883,175.438) 184.544,175.438 ccw(c185.205,175.438) v1@184.737,174.971 ; v1(184.544,174.777) 184.544,176.022 185.676,177.154 190.895,177.154 195.605,181.864 EXT_SPI.3@211.836,181.864 ; EXT_SPI.3@211.36,181.388 ccw(c210.209,180.237) 210.209,181.864 ccw(c210.209,183.491) EXT_SPI.3@211.36,182.34 ; EXT_SPI.3@211.467,181.495 ccw(c210.577,180.605) 210.577,181.864 ccw(c210.577,183.123) EXT_SPI.3@211.467,182.233 ; EXT_SPI.3@211.575,181.603 ccw(c210.945,180.973) 210.945,181.864 ccw(c210.945,182.755) EXT_SPI.3@211.575,182.125
/SPICS3: EXT_SPI.5 U8.12 | length 84.9
  Top Layer w0.152: v1@184.978,175.905 ccw(c184.708,176.175) 185.09,176.175 ; 185.09,176.202 ccw(c185.662,176.202) v1@185.257,175.797 ; 185.09,176.57 ccw(c186.03,176.57) v1@185.365,175.905 ; v1(185.172,175.712) 185.09,175.793 185.09,216.129 185.115,216.154 ; U8.12@185.421,216.009 ccw(c185.115,215.759) 185.115,216.154 ; U8.12@185.421,216.299 cw(c185.115,216.549) 185.115,216.154 ; U8.12@186.309,216.154 185.115,216.154
  Bottom Layer w0.152: v1(185.172,175.712) 191.129,175.712 193.497,178.079 214.605,178.079 215.329,178.804 215.329,179.92 214.96,180.289 212.801,180.289 ; v1@185.365,175.518 cw(c185.833,175.051) 185.833,175.712 cw(c185.833,176.373) v1@185.365,175.905 ; EXT_SPI.5@211.836,179.324 212.801,180.289 ; EXT_SPI.5@211.904,179.841 ccw(c212.011,180.643) 212.583,180.071 ccw(c213.155,179.499) EXT_SPI.5@212.353,179.392 ; EXT_SPI.5@211.924,179.992 ccw(c212.062,181.029) 212.801,180.289 ; EXT_SPI.5@212.504,179.412 cw(c213.541,179.55) 212.801,180.289
/SPICS4: EXT_SPI.7 U8.11 | length 105.4
  Top Layer w0.152: U8.11@186.309,214.884 187.731,214.884 v1(187.757,214.859) ; U8.11@187.034,214.884 cw(c187.034,214.136) v1@187.563,214.665 ; U8.11@187.157,214.884 ccw(c187.157,215.458) v1@187.563,215.052 ; U8.11@187.182,214.722 cw(c187.572,214.332) 187.572,214.884 cw(c187.572,215.436) U8.11@187.182,215.046 ; 187.402,214.884 cw(c187.402,214.504) v1@187.671,214.773
  Bottom Layer w0.152: v1(187.757,214.859) 200.609,214.859 211.303,225.552 217.805,225.552 218.211,225.146 218.211,174.219 216.992,172.999 213.208,172.999 212.852,173.355 212.852,175.768 ; v1@187.95,214.665 cw(c188.418,214.198) 188.418,214.859 cw(c188.418,215.52) v1@187.95,215.052 ; EXT_SPI.7@211.836,176.784 212.852,175.768 ; EXT_SPI.7@211.87,176.417 cw(c211.93,175.765) 212.392,176.228 cw(c212.855,176.69) EXT_SPI.7@212.203,176.75 ; EXT_SPI.7@211.884,176.265 cw(c211.968,175.344) 212.622,175.998 cw(c213.276,176.652) EXT_SPI.7@212.355,176.736 ; EXT_SPI.7@211.898,176.113 cw(c212.007,174.923) 212.852,175.768 ; EXT_SPI.7@212.507,176.722 ccw(c213.697,176.613) 212.852,175.768
/SPICS5: EXT_SPI.9 U8.10 | length 73.5
  Top Layer w0.152: U8.10@186.309,213.614 187.249,213.614 187.249,212.852 187.528,212.573 187.528,211.861 187.071,211.404 v1(187.071,175.158) ; v1@186.877,175.352 ccw(c186.41,175.819) 187.071,175.819 ccw(c187.732,175.819) v1@187.265,175.352 ; U8.10@186.905,213.416 cw(c186.557,212.818) 187.249,212.818 ; U8.10@186.982,213.548 cw(c186.711,213.084) 187.249,213.084 ; U8.10@187.059,213.68 cw(c186.866,213.349) 187.249,213.349
  Bottom Layer w0.152: v1(187.071,175.158) 187.127,175.215 210.865,175.215 ; v1@187.157,175.073 cw(c187.5,174.729) 187.5,175.215 ; v1@187.265,174.965 cw(c187.868,174.361) 187.868,175.215 ; v1@187.265,175.352 ccw(c187.596,175.683) 187.596,175.215 ; EXT_SPI.9@211.168,174.329 ccw(c210.115,174.464) 210.865,175.215 ; EXT_SPI.9@211.319,174.31 ccw(c210.504,174.414) 211.085,174.995 ccw(c211.666,175.576) EXT_SPI.9@211.77,174.761 ; EXT_SPI.9@211.47,174.291 ccw(c210.893,174.365) 211.304,174.776 ccw(c211.715,175.187) EXT_SPI.9@211.789,174.61 ; EXT_SPI.9@211.751,174.912 cw(c211.616,175.965) 210.865,175.215 ; EXT_SPI.9@211.836,174.244 210.865,175.215
/SPICS6: EXT_SPI.11 U8.9 | length 75.8
  Top Layer w0.152: v1@186.115,174.895 ccw(c185.648,175.362) 186.309,175.362 ccw(c186.97,175.362) v1@186.503,174.895 ; U8.9@186.147,212.182 cw(c185.757,211.792) 186.309,211.792 cw(c186.861,211.792) U8.9@186.471,212.182 ; v1(186.309,174.701) U8.9@186.309,212.344 ; v1@208.823,174.355 cw(c208.356,173.888) 209.017,173.888 cw(c209.678,173.888) v1@209.21,174.355 ; v1(209.017,174.549) 209.017,172.085 209.398,171.704 EXT_SPI.11@211.836,171.704 ; EXT_SPI.11@211.36,171.228 ccw(c210.209,170.077) 210.209,171.704 ccw(c210.209,173.331) EXT_SPI.11@211.36,172.18 ; EXT_SPI.11@211.467,171.335 ccw(c210.577,170.445) 210.577,171.704 ccw(c210.577,172.963) EXT_SPI.11@211.467,172.073 ; EXT_SPI.11@211.575,171.443 ccw(c210.945,170.813) 210.945,171.704 ccw(c210.945,172.595) EXT_SPI.11@211.575,171.965
  Bottom Layer w0.152: v1(186.309,174.701) 186.41,174.6 187.624,174.6 187.959,174.935 208.63,174.935 ; v1@208.746,174.588 ccw(c208.341,174.646) 208.63,174.935 ; v1@208.978,174.82 cw(c208.919,175.224) 208.63,174.935 ; v1(209.017,174.549) 208.63,174.935
/SPICS7: EXT_SPI.13 U8.7 | length 93.3
  Top Layer w0.152: v1@179.965,181.102 ccw(c179.304,181.102) 179.771,181.569 ccw(c180.238,182.037) v1@180.238,181.376 ; v1(180.238,181.102) 175.997,185.344 175.997,204.601 182.22,210.824 182.22,213.124 181.73,213.614 U8.7@180.721,213.614 ; U8.7@181.432,213.538 cw(c181.432,212.636) 182.07,213.274 ; U8.7@181.432,213.69 cw(c181.432,213.156) 181.81,213.534
  Bottom Layer w0.152: v1@180.045,180.908 cw(c179.577,180.441) 180.238,180.441 cw(c180.899,180.441) v1@180.432,180.908 ; v1(180.238,181.102) 180.238,175.387 181.788,173.838 188.417,173.838 189.236,174.656 207.766,174.656 209.702,172.72 215.024,172.72 215.341,172.403 215.341,168.567 214.947,168.173 211.836,168.199 ; EXT_SPI.13@211.604,168.531 cw(c211.482,168.199) 211.836,168.199 ; EXT_SPI.13@211.836,169.164 211.836,168.199 ; EXT_SPI.13@212.068,168.531 ccw(c212.19,168.199) 211.836,168.199
/WE: EXT.49 MEM0.49 MEM1.49 MEM2.49 MEM3.49 U1.91 U2.4 | length 322.2
  Top Layer w0.152: U1.91@101.092,157.48 102.26,157.48 v1(102.26,158.521) ; U1.91@101.942,157.909 ccw(c101.513,158.521) v1(102.26,158.521) ; U1.91@102.029,157.784 ccw(c101.718,158.229) v1@102.26,158.229 ; v1@102.067,158.328 cw(c101.599,157.86) 102.26,157.86 cw(c102.921,157.86) v1@102.454,158.328 ; v1@102.26,158.207 ccw(c102.815,158.207) U1.91@102.472,157.772 ; U1.91@102.566,157.892 cw(c103.062,158.521) v1(102.26,158.521) ; EXT.49@113.055,25.531 ccw(c112.066,25.706) 112.776,26.416 ; MEM3.49@113.173,52.008 cw(c111.807,51.896) 112.776,50.927 ; MEM0.49@113.179,119.264 cw(c112.118,119.098) 112.878,118.339 ; EXT.49@113.205,25.504 ccw(c112.417,25.644) 112.983,26.209 ccw(c113.548,26.775) EXT.49@113.688,25.987 ; 113.242,95.538 ccw(c112.718,96.062) MEM1.49@113.315,96.5 ; 113.25,73.093 ccw(c112.728,73.615) MEM2.49@113.319,74.058 ; MEM3.49@113.325,52.021 cw(c112.237,51.931) 113.009,51.16 cw(c113.78,50.388) MEM3.49@113.87,51.476 ; MEM0.49@113.33,119.288 cw(c112.485,119.155) 113.09,118.551 cw(c113.694,117.946) MEM0.49@113.827,118.791 ; EXT.49@113.355,25.478 ccw(c112.769,25.581) 113.19,26.002 ccw(c113.611,26.423) EXT.49@113.714,25.837 ; 113.367,95.663 ccw(c112.862,96.168) MEM1.49@113.438,96.591 ; 113.375,73.217 ccw(c112.87,73.722) MEM2.49@113.441,74.149 ; MEM3.49@113.39,52.599 ccw(c112.111,53.878) 113.919,53.878 ccw(c115.727,53.878) MEM3.49@114.448,52.599 ; MEM2.49@113.39,75.036 ccw(c112.111,76.314) 113.919,76.314 ccw(c115.727,76.314) MEM2.49@114.448,75.036 ; MEM1.49@113.39,97.473 ccw(c112.111,98.751) 113.919,98.751 ccw(c115.727,98.751) MEM1.49@114.448,97.473 ; MEM3.49@113.477,52.034 cw(c112.667,51.967) 113.241,51.392 cw(c113.816,50.818) MEM3.49@113.883,51.628 ; MEM0.49@113.48,119.311 cw(c112.851,119.213) 113.302,118.763 cw(c113.752,118.312) MEM0.49@113.85,118.941 ; MEM0.49@113.486,119.991 ccw(c112.894,120.828) 113.919,120.828 ; 113.493,95.789 ccw(c113.007,96.275) MEM1.49@113.561,96.681 ; MEM3.49@113.497,52.492 ccw(c112.479,53.51) 113.919,53.51 ccw(c115.359,53.51) MEM3.49@114.341,52.492 ; MEM2.49@113.497,74.928 ccw(c112.479,75.947) 113.919,75.947 ccw(c115.359,75.947) MEM2.49@114.341,74.928 ; MEM1.49@113.497,97.365 ccw(c112.479,98.383) 113.919,98.383 ccw(c115.359,98.383) MEM1.49@114.341,97.365 ; 113.499,73.342 ccw(c113.012,73.828) MEM2.49@113.563,74.241 ; MEM0.49@113.574,119.867 ccw(c113.103,120.533) 113.919,120.533 ccw(c114.735,120.533) MEM0.49@114.264,119.867 ; MEM3.49@113.605,52.384 ccw(c112.847,53.142) 113.919,53.142 ccw(c114.991,53.142) MEM3.49@114.233,52.384 ; MEM2.49@113.605,74.821 ccw(c112.847,75.579) 113.919,75.579 ccw(c114.991,75.579) MEM2.49@114.233,74.821 ; MEM1.49@113.605,97.257 ccw(c112.847,98.015) 113.919,98.015 ccw(c114.991,98.015) MEM1.49@114.233,97.257 ; 113.618,95.915 ccw(c113.152,96.381) MEM1.49@113.684,96.771 ; 113.623,73.466 ccw(c113.155,73.935) MEM2.49@113.685,74.332 ; EXT.49@113.661,26.137 cw(c113.486,27.126) 112.776,26.416 ; MEM0.49@113.662,119.742 ccw(c113.311,120.238) 113.919,120.238 ccw(c114.527,120.238) MEM0.49@114.176,119.742 ; 113.744,96.04 ccw(c113.297,96.487) MEM1.49@113.807,96.861 ; 113.748,73.59 ccw(c113.297,74.041) MEM2.49@113.808,74.423 ; EXT.49@113.792,25.4 112.776,26.416 ; MEM0.49@113.803,118.64 ccw(c113.637,117.579) 112.878,118.339 ; MEM3.49@113.857,51.324 ccw(c113.745,49.958) 112.776,50.927 ; v1@113.954,156.296 cw(c113.487,155.828) 114.148,155.828 cw(c114.809,155.828) v1@114.341,156.296 ; v1(114.148,156.489) 114.148,121.056 113.919,120.828 ; MEM0.49@114.352,119.991 cw(c114.944,120.828) 113.919,120.828 ; v1(144.399,157.582) 145.388,157.582 146.71,158.904 146.71,193.269 150.063,196.621 164.465,196.621 164.846,197.002 U2.4@164.846,221.488 ; v1@144.593,157.388 cw(c145.06,156.921) 145.06,157.582 cw(c145.06,158.243) v1@144.593,157.775 ; U2.4@164.684,220.615 cw(c164.294,220.225) 164.846,220.225 cw(c165.398,220.225) U2.4@165.008,220.615 ; 112.776,26.416 112.776,50.927 ; 112.776,50.927 MEM3.49@113.919,52.07 113.919,61.493 112.878,62.535 112.878,72.72 113.919,73.762 MEM2.49@113.919,74.507 113.919,83.922 112.878,84.963 112.878,95.174 113.919,96.215 MEM1.49@113.919,96.943 113.919,106.655 112.878,107.696 112.878,118.339 ; 112.878,118.339 MEM0.49@113.919,119.38 113.919,120.828
  Bottom Layer w0.152: v1@102.26,158.248 cw(c102.26,157.587) 102.728,158.054 cw(c103.195,158.521) v1@102.534,158.521 ; v1(102.26,158.521) 104.292,156.489 v1(114.148,156.489) 115.24,157.582 v1(144.399,157.582) ; v1@113.954,156.296 ccw(c113.487,155.828) 113.487,156.489 ccw(c113.487,157.15) v1@113.954,156.683 ; v1@114.148,156.763 ccw(c114.148,157.424) 114.615,156.957 ccw(c115.082,156.489) v1@114.421,156.489 ; v1@144.205,157.388 ccw(c143.738,156.921) 143.738,157.582 ccw(c143.738,158.243) v1@144.205,157.775
A: U1.7 U3.7 | length 153.1
  Top Layer w0.152: U1.7@151.892,200.66 v1(154.305,200.66) ; U1.7@153.305,200.398 cw(c153.937,199.766) 153.937,200.66 cw(c153.937,201.554) U1.7@153.305,200.922 ; U1.7@153.413,200.29 cw(c154.305,199.399) v1(154.305,200.66) ; U1.7@153.413,201.03 ccw(c154.305,201.921) v1(154.305,200.66) ; v1@154.111,200.466 ccw(c153.644,199.999) 153.644,200.66 ccw(c153.644,201.321) v1@154.111,200.854
  Bottom Layer w0.152: v1@154.305,200.386 cw(c154.305,199.725) 154.772,200.193 cw(c155.24,200.66) v1@154.579,200.66 ; v1(154.305,200.66) 159.233,195.732 159.233,195.021 159.506,194.747 159.506,192.024 159.71,191.821 170.078,191.821 174.955,186.944 174.955,166.052 175.273,165.735 184.861,165.735 185.699,166.573 188.023,166.573 189.522,165.075 212.407,165.075 212.801,164.681 212.801,118.313 U3.7@209.55,115.062 ; U3.7@209.55,115.431 ccw(c209.55,116.322) 210.18,115.692 ccw(c210.81,115.062) U3.7@209.919,115.062 ; U3.7@209.55,115.583 ccw(c209.55,116.842) 210.44,115.952 ccw(c211.33,115.062) U3.7@210.071,115.062 ; U3.7@209.55,115.736 ccw(c209.55,117.362) 210.7,116.212 ccw(c211.85,115.062) U3.7@210.224,115.062
A00: EXT.1 MEM0.1 MEM1.1 MEM2.1 MEM3.1 U1.56 | length 290.3
  Top Layer w0.152: U1.56@106.68,203.2 125.425,203.2 v1(143.027,185.598) ; U1.56@108.093,202.937 cw(c108.727,202.303) 108.727,203.2 cw(c108.727,204.097) U1.56@108.093,203.463 ; U1.56@108.2,202.83 cw(c109.095,201.935) 109.095,203.2 cw(c109.095,204.465) U1.56@108.2,203.57 ; v1@142.754,185.598 ccw(c142.093,185.598) 142.56,186.065 ccw(c143.027,186.533) v1@143.027,185.872 ; v1(158.928,184.15) 168.605,184.15 168.923,183.832 168.923,154.8 169.901,153.822 v1(169.901,124.358) ; v1@159.121,183.956 cw(c159.589,183.489) 159.589,184.15 cw(c159.589,184.811) v1@159.121,184.344 ; v1@169.707,124.552 ccw(c169.24,125.019) 169.901,125.019 ccw(c170.562,125.019) v1@170.094,124.552 ; EXT.1@174.015,25.531 ccw(c173.026,25.706) 173.736,26.416 ; MEM3.1@174.133,52.008 cw(c172.767,51.896) 173.736,50.927 ; MEM3.1@174.139,52.186 ccw(c173.078,52.352) 173.838,53.111 ; MEM2.1@174.139,74.391 cw(c173.078,74.225) 173.838,73.465 ; MEM2.1@174.139,74.623 ccw(c173.078,74.789) 173.838,75.548 ; MEM1.1@174.139,96.827 cw(c173.078,96.661) 173.838,95.902 ; MEM1.1@174.139,97.059 ccw(c173.078,97.225) 173.838,97.985 ; MEM0.1@174.139,119.264 cw(c173.078,119.098) 173.838,118.339 ; EXT.1@174.165,25.504 ccw(c173.377,25.644) 173.943,26.209 ccw(c174.508,26.775) EXT.1@174.648,25.987 ; MEM3.1@174.285,52.021 cw(c173.197,51.931) 173.969,51.16 cw(c174.74,50.388) MEM3.1@174.83,51.476 ; MEM3.1@174.29,52.162 ccw(c173.445,52.295) 174.05,52.899 ccw(c174.654,53.504) MEM3.1@174.787,52.659 ; MEM2.1@174.29,74.414 cw(c173.445,74.282) 174.05,73.677 cw(c174.654,73.073) MEM2.1@174.787,73.917 ; MEM2.1@174.29,74.599 ccw(c173.445,74.731) 174.05,75.336 ccw(c174.654,75.941) MEM2.1@174.787,75.096 ; MEM1.1@174.29,96.851 cw(c173.445,96.719) 174.05,96.114 cw(c174.654,95.509) MEM1.1@174.787,96.354 ; MEM1.1@174.29,97.036 ccw(c173.445,97.168) 174.05,97.773 ccw(c174.654,98.377) MEM1.1@174.787,97.533 ; MEM0.1@174.29,119.288 cw(c173.445,119.155) 174.05,118.551 cw(c174.654,117.946) MEM0.1@174.787,118.791 ; EXT.1@174.315,25.478 ccw(c173.729,25.581) 174.15,26.002 ccw(c174.571,26.423) EXT.1@174.674,25.837 ; MEM3.1@174.437,52.034 cw(c173.627,51.967) 174.201,51.392 cw(c174.776,50.818) MEM3.1@174.843,51.628 ; MEM3.1@174.44,52.139 ccw(c173.811,52.237) 174.262,52.687 ccw(c174.712,53.138) MEM3.1@174.81,52.509 ; MEM2.1@174.44,74.438 cw(c173.811,74.339) 174.262,73.889 cw(c174.712,73.439) MEM2.1@174.81,74.068 ; MEM2.1@174.44,74.575 ccw(c173.811,74.674) 174.262,75.124 ccw(c174.712,75.574) MEM2.1@174.81,74.945 ; MEM1.1@174.44,96.875 cw(c173.811,96.776) 174.262,96.326 cw(c174.712,95.876) MEM1.1@174.81,96.505 ; MEM1.1@174.44,97.012 ccw(c173.811,97.111) 174.262,97.561 ccw(c174.712,98.011) MEM1.1@174.81,97.382 ; MEM0.1@174.44,119.311 cw(c173.811,119.213) 174.262,118.763 cw(c174.712,118.312) MEM0.1@174.81,118.941 ; EXT.1@174.621,26.137 cw(c174.446,27.126) 173.736,26.416 ; EXT.1@174.752,25.4 173.736,26.416 ; MEM3.1@174.763,52.81 cw(c174.597,53.871) 173.838,53.111 ; MEM2.1@174.763,73.767 ccw(c174.597,72.706) 173.838,73.465 ; MEM2.1@174.763,75.246 cw(c174.597,76.307) 173.838,75.548 ; MEM1.1@174.763,96.204 ccw(c174.597,95.143) 173.838,95.902 ; MEM1.1@174.763,97.683 cw(c174.597,98.744) 173.838,97.985 ; MEM0.1@174.763,118.64 ccw(c174.597,117.579) 173.838,118.339 ; MEM3.1@174.817,51.324 ccw(c174.705,49.958) 173.736,50.927 ; MEM0.1@174.879,119.38 173.838,118.339 ; 173.736,26.416 173.736,50.927 ; 173.736,50.927 MEM3.1@174.879,52.07 173.838,53.111 ; 173.838,53.111 173.838,73.465 ; 173.838,73.465 MEM2.1@174.879,74.507 173.838,75.548 ; 173.838,75.548 173.838,95.902 ; 173.838,95.902 MEM1.1@174.879,96.943 173.838,97.985 ; 173.838,97.985 173.838,118.339
  Bottom Layer w0.152: v1(143.027,185.598) 157.48,185.598 v1(158.928,184.15) ; v1@143.221,185.404 cw(c143.688,184.937) 143.688,185.598 cw(c143.688,186.259) v1@143.221,185.791 ; v1@158.654,184.15 ccw(c157.993,184.15) 158.46,184.617 ccw(c158.928,185.085) v1@158.928,184.424 ; v1@169.901,124.085 cw(c169.901,123.424) 170.368,123.891 cw(c170.835,124.358) v1@170.174,124.358 ; v1(169.901,124.358) MEM0.1@174.879,119.38 ; MEM0.1@174.13,119.38 ccw(c172.322,119.38) 173.601,120.658 ccw(c174.879,121.937) MEM0.1@174.879,120.129 ; MEM0.1@174.283,119.38 ccw(c172.843,119.38) 173.861,120.398 ccw(c174.879,121.416) MEM0.1@174.879,119.976 ; MEM0.1@174.435,119.38 ccw(c173.363,119.38) 174.121,120.138 ccw(c174.879,120.896) MEM0.1@174.879,119.824